# Altium PCB standos_rpi_com_sample.PcbDoc
Units mm, origin at the board's own origin, x right, y up, seen from the top; angles counter-clockwise.
Board outline 98 x 35 mm, 2 copper layers (Top Layer, Bottom Layer); 3 components, 0 nets, 76 pads, 0 vias.
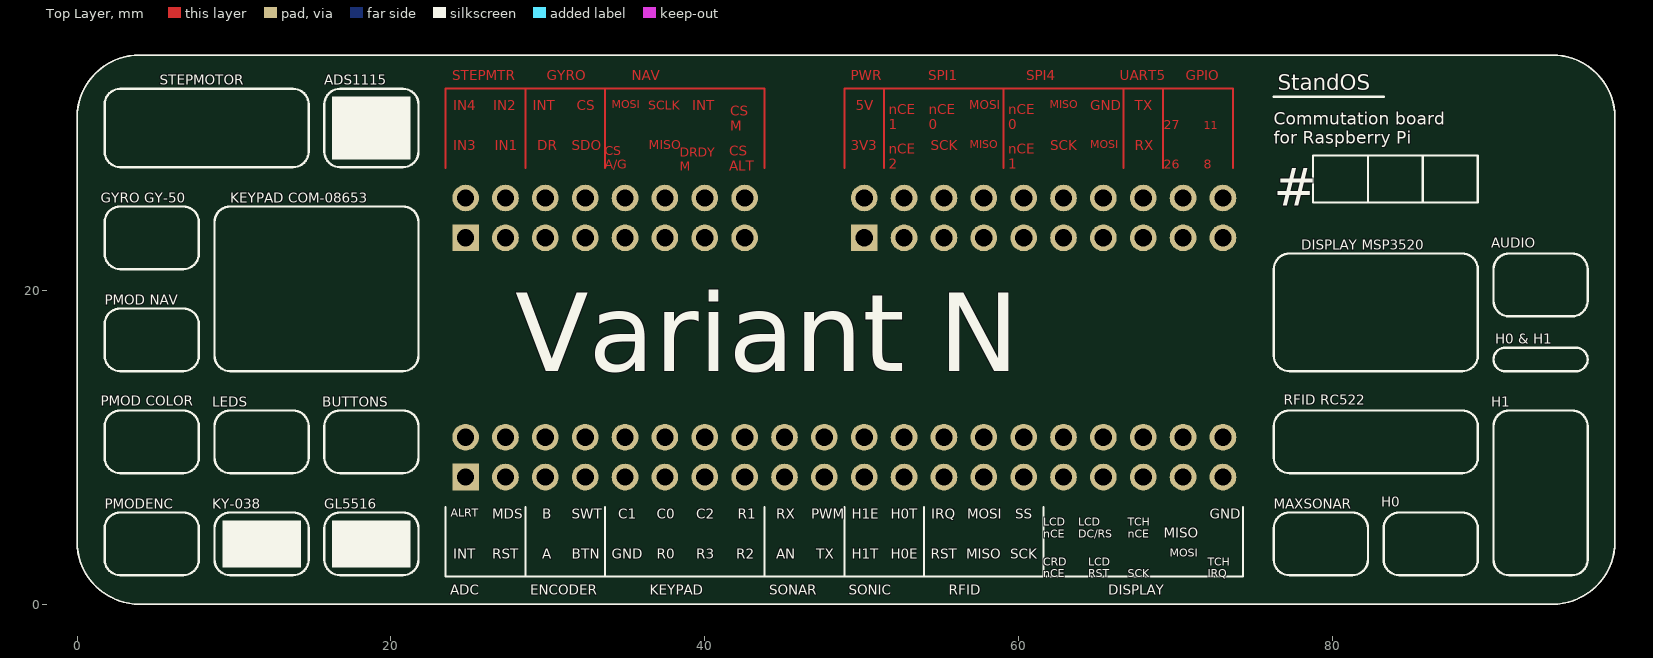
[diagram p0: Top Layer view]
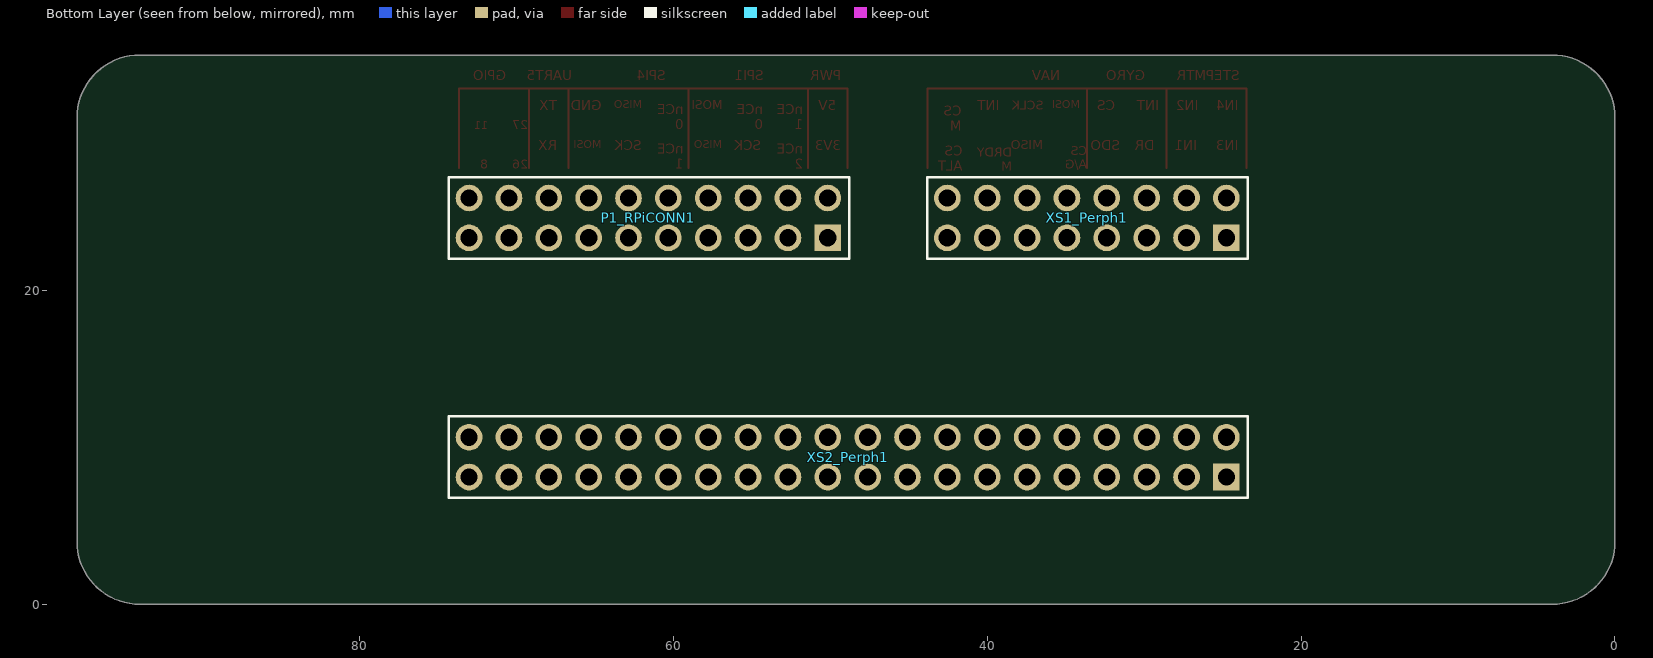
[diagram p1: Bottom Layer view, seen from below]

## Layer stack, top to bottom
Top Solder: solder mask 0.0102, Solder Resist, Dk 3.5
Top Layer: signal copper 0.0356
Dielectric 1: dielectric 0.32, FR-4, Dk 4.8
Bottom Layer: signal copper 0.0356
Bottom Solder: solder mask 0.0102, Solder Resist, Dk 3.5

## Board outline
0,4 0,31 cw(c4,31) 4,35 94,35 cw(c94,31) 98,31 98,4 cw(c94,4) 94,0 4,0 cw(c4,4)

## Design rules (kind name [scope] priority, off if disabled: settings)
Clearance [All] p1: gap=0.254 ignorepadtopadclearanceinfootprint=FALSE except(0: Arc-Hole Track-Hole SMDPad-Hole THPad-Hole Via-Hole Fill-Hole Poly-Hole Region-Hole Text-Hole)
PolygonConnect [All] p1: connectstyle=Relief reliefconductorwidth=0.254 reliefentries=4 polygonreliefangle="90 Angle" airgapwidth=0.254
RoutingVias [All] p1: holewidth=0.711 width=1.27 viastyle="Through Hole" minholewidth=0.711 minwidth=1.27 maxholewidth=0.711 maxwidth=1.27
SolderMaskExpansion [All] p1: expansion=0.102 istentingtop=FALSE
Width [All] p1: maxlimit=0.254 minlimit=0.254 preferedwidth=0.254
30 further rules are at their usual default settings.

## Components (designator, comment, footprint, x,y, rotation, side; value= is the part's Value field where it differs from the comment)
P1_RPiCONN1 "PLD-20" PLD-20_reverse 50.16,23.35 r0 bottom (schematic designator P1)
XS1_Perph1 "PLD-16" PLD-16_reverse 24.76,23.35 r0 bottom (schematic designator XS1)
XS2_Perph1 "PLD-40" PLD-40_reverse 24.76,8.11 r0 bottom (schematic designator XS2)

## Footprints (in the part's own frame and the unit in brackets; to place one, negate y for a bottom-side part, rotate by r counter-clockwise, add the part's x,y. Pads: shape width x height; smd on the part's side, far side on the other; paste and mask are expansions set on the pad)
PLD-16_reverse [mm]
  rect 1.7x1.7 hole 1.1: 1(0,0)
  round 1.7 hole 1.1: 2(0,-2.54) 3(2.54,0) 4(2.54,-2.54) 5(5.08,0) 6(5.08,-2.54) 7(7.62,0) 8(7.62,-2.54) 9(10.16,0) 10(10.16,-2.54) 11(12.7,0) 12(12.7,-2.54) 13(15.24,0) 14(15.24,-2.54) 15(17.78,0) 16(17.78,-2.54)
  silkscreen extent -1.36,-3.87 19.07,1.33, body extent -1.29,-3.8 19.03,1.28, height 8.54
PLD-20_reverse [mm]
  rect 1.7x1.7 hole 1.1: 1(0,0)
  round 1.7 hole 1.1: 2(0,-2.54) 3(2.54,0) 4(2.54,-2.54) 5(5.08,0) 6(5.08,-2.54) 7(7.62,0) 8(7.62,-2.54) 9(10.16,0) 10(10.16,-2.54) 11(12.7,0) 12(12.7,-2.54) 13(15.24,0) 14(15.24,-2.54) 15(17.78,0) 16(17.78,-2.54) 17(20.32,0) 18(20.32,-2.54) 19(22.86,0) 20(22.86,-2.54)
  silkscreen extent -1.36,-3.87 24.15,1.33, body extent -1.29,-3.8 24.11,1.28, height 8.54
PLD-40_reverse [mm]
  rect 1.7x1.7 hole 1.1: 1(0,0)
  round 1.7 hole 1.1: 2(0,-2.54) 3(2.54,0) 4(2.54,-2.54) 5(5.08,0) 6(5.08,-2.54) 7(7.62,0) 8(7.62,-2.54) 9(10.16,0) 10(10.16,-2.54) 11(12.7,0) 12(12.7,-2.54) 13(15.24,0) 14(15.24,-2.54) 15(17.78,0) 16(17.78,-2.54) 17(20.32,0) 18(20.32,-2.54) 19(22.86,0) 20(22.86,-2.54) 21(25.4,0) 22(25.4,-2.54) 23(27.94,0) 24(27.94,-2.54) 25(30.48,0) 26(30.48,-2.54) 27(33.02,0) 28(33.02,-2.54) 29(35.56,0) 30(35.56,-2.54) 31(38.1,0) 32(38.1,-2.54) 33(40.64,0) 34(40.64,-2.54) 35(43.18,0) 36(43.18,-2.54) 37(45.72,0) 38(45.72,-2.54) 39(48.26,0) 40(48.26,-2.54)
  silkscreen extent -1.36,-3.87 49.55,1.33, body extent -1.29,-3.8 49.51,1.28, height 8.54

## Nets (pads, with @x,y where several pads share a name; then routed paths per layer and width w, separated by ;. In a path a pad name is that pad's centre, name@x,y a point inside that pad or via, vN(x,y) a via of type N, cw(c..) or ccw(c..) an arc to the next point about the centre after c; other vN are vias at no path point)
pads on no net: P1_RPiCONN1.1 P1_RPiCONN1.2 P1_RPiCONN1.3 P1_RPiCONN1.4 P1_RPiCONN1.5 P1_RPiCONN1.6 P1_RPiCONN1.7 P1_RPiCONN1.8 P1_RPiCONN1.9 P1_RPiCONN1.10 P1_RPiCONN1.11 P1_RPiCONN1.12 P1_RPiCONN1.13 P1_RPiCONN1.14 P1_RPiCONN1.15 P1_RPiCONN1.16 P1_RPiCONN1.17 P1_RPiCONN1.18 P1_RPiCONN1.19 P1_RPiCONN1.20 XS1_Perph1.1 XS1_Perph1.2 XS1_Perph1.3 XS1_Perph1.4 XS1_Perph1.5 XS1_Perph1.6 XS1_Perph1.7 XS1_Perph1.8 XS1_Perph1.9 XS1_Perph1.10 XS1_Perph1.11 XS1_Perph1.12 XS1_Perph1.13 XS1_Perph1.14 XS1_Perph1.15 XS1_Perph1.16 XS2_Perph1.1 XS2_Perph1.2 XS2_Perph1.3 XS2_Perph1.4 XS2_Perph1.5 XS2_Perph1.6 XS2_Perph1.7 XS2_Perph1.8 XS2_Perph1.9 XS2_Perph1.10 XS2_Perph1.11 XS2_Perph1.12 XS2_Perph1.13 XS2_Perph1.14 XS2_Perph1.15 XS2_Perph1.16 XS2_Perph1.17 XS2_Perph1.18 XS2_Perph1.19 XS2_Perph1.20 XS2_Perph1.21 XS2_Perph1.22 XS2_Perph1.23 XS2_Perph1.24 XS2_Perph1.25 XS2_Perph1.26 XS2_Perph1.27 XS2_Perph1.28 XS2_Perph1.29 XS2_Perph1.30 XS2_Perph1.31 XS2_Perph1.32 XS2_Perph1.33 XS2_Perph1.34 XS2_Perph1.35 XS2_Perph1.36 XS2_Perph1.37 XS2_Perph1.38 XS2_Perph1.39 XS2_Perph1.40
copper on no net: | length 95.9
  Top Layer w0.127: 23.49,27.795 23.49,32.875 43.81,32.875 43.81,27.795 ; 28.57,27.795 28.57,32.875 ; 33.65,27.795 33.65,32.875 ; 48.89,27.795 48.89,32.875 51.43,32.875 ; 51.43,27.795 51.43,32.875 ; 59.05,27.795 59.05,32.875 ; 66.67,27.795 66.67,32.875 ; 69.21,27.795 69.21,32.875 ; 73.655,27.795 73.655,32.875 69.21,32.875 ; 51.43,32.875 59.05,32.875 ; 59.05,32.875 66.67,32.875 ; 66.67,32.875 69.21,32.875

## Other copper
Top Layer:
  text "STEPMTR" at 23.914,33.383 h0.64
  text "GYRO" at 29.946,33.383 h0.64
  text "NAV" at 35.344,33.383 h0.64
  text "PWR" at 49.314,33.383 h0.64
  text "SPI1" at 54.235,33.383 h0.64
  text "SPI4" at 60.479,33.383 h0.64
  text "UART5" at 66.459,33.383 h0.64
  text "GPIO" at 70.639,33.383 h0.64
  text "MOSI" at 34.074,31.605 h0.51
  text "MISO" at 61.971,31.605 h0.51
  text "MOSI" at 56.849,31.554 h0.56
  text "SCLK" at 36.389,31.529 h0.58
  text "IN4" at 23.967,31.478 h0.64
  text "IN2" at 26.507,31.478 h0.64
  text "INT" at 29.047,31.478 h0.64
  text "CS" at 31.851,31.478 h0.64
  text "INT" at 39.207,31.478 h0.64
  text "5V" at 49.631,31.478 h0.64
  text "GND" at 64.554,31.478 h0.64
  text "TX" at 67.411,31.478 h0.64
  text "nCE / 1" at 51.727,30.285 h0.64
  text "nCE / 0" at 54.267,30.285 h0.64
  text "nCE / 0" at 59.347,30.285 h0.64
  text "27" at 69.242,30.285 h0.58
  text "11" at 71.782,30.285 h0.51
  text "CS / M" at 41.62,30.168 h0.64
  text "MISO" at 56.891,29.065 h0.51
  text "MOSI" at 64.554,29.065 h0.51
  text "MISO" at 36.438,28.989 h0.58
  text "IN3" at 23.967,28.938 h0.64
  text "IN1" at 26.612,28.938 h0.64
  text "DR" at 29.311,28.938 h0.64
  text "SDO" at 31.534,28.938 h0.64
  text "3V3" at 49.314,28.938 h0.64
  text "SCK" at 54.394,28.938 h0.64
  text "SCK" at 62.014,28.938 h0.64
  text "RX" at 67.411,28.938 h0.64
  text "CS / A/G" at 33.64,27.745 h0.58
  text "nCE / 2" at 51.727,27.745 h0.64
  text "nCE / 1" at 59.347,27.745 h0.64
  text "26" at 69.242,27.745 h0.58
  text "8" at 71.782,27.745 h0.58
  text "DRDY / M" at 38.392,27.628 h0.58
  text "CS / ALT" at 41.567,27.628 h0.64

## Silkscreen, mask and mechanical layers (free items; w line width, h text height)
Top Overlay:
  drawing of 169 lines, arcs and shapes, not listed
  text "STEPMOTOR" at 5.26,33.1 h0.64
  text "ADS1115" at 15.76,33.1 h0.64
  text "StandOS" at 76.5,32.75 h1
  text "Commutation board / for Raspberry Pi" at 76.26,29.35 h0.8
  text "GYRO GY-50" at 1.51,25.6 h0.64
  text "KEYPAD COM-08653" at 9.76,25.6 h0.64
  text "#" at 76.26,25.4 h2.4
  text "AUDIO" at 90.118,22.711 h0.64
  text "DISPLAY MSP3520" at 78.01,22.6 h0.64
  text "PMOD NAV" at 1.76,19.1 h0.64
  text "H0 & H1" at 90.368,16.6 h0.64
  text "Variant N" at 27.933,14.852 h5
  text "RFID RC522" at 76.885,12.711 h0.64
  text "PMOD COLOR" at 1.51,12.645 h0.64
  text "LEDS" at 8.618,12.6 h0.64
  text "BUTTONS" at 15.618,12.6 h0.64
  text "H1" at 90.118,12.6 h0.64
  text "H0" at 83.118,6.211 h0.64
  text "PMODENC" at 1.76,6.1 h0.64
  text "KY-038" at 8.618,6.1 h0.64
  text "GL5516" at 15.76,6.1 h0.64
  text "MAXSONAR" at 76.26,6.1 h0.64
  text "ALRT" at 23.829,5.57 h0.51
  text "MDS" at 26.454,5.443 h0.64
  text "B" at 29.628,5.443 h0.64
  text "SWT" at 31.534,5.443 h0.64
  text "C1" at 34.497,5.443 h0.64
  text "C0" at 36.931,5.443 h0.64
  text "C2" at 39.471,5.443 h0.64
  text "R1" at 42.117,5.443 h0.64
  text "RX" at 44.551,5.443 h0.64
  text "PWM" at 46.774,5.443 h0.64
  text "H1E" at 49.367,5.443 h0.64
  text "H0T" at 51.854,5.443 h0.64
  text "IRQ" at 54.447,5.443 h0.64
  text "MOSI" at 56.722,5.443 h0.64
  text "SS" at 59.791,5.443 h0.64
  text "GND" at 72.174,5.443 h0.64
  text "LCD / nCE" at 61.569,4.25 h0.51
  text "LCD / DC/RS" at 63.792,4.25 h0.51
  text "TCH / nCE" at 66.967,4.25 h0.51
  text "MISO" at 69.242,4.25 h0.64
  text "MOSI" at 69.634,3.03 h0.51
  text "INT" at 23.967,2.903 h0.64
  text "RST" at 26.454,2.903 h0.64
  text "A" at 29.628,2.903 h0.64
  text "BTN" at 31.534,2.903 h0.64
  text "GND" at 34.074,2.903 h0.64
  text "R0" at 36.931,2.903 h0.64
  text "R3" at 39.471,2.903 h0.64
  text "R2" at 42.011,2.903 h0.64
  text "AN" at 44.551,2.903 h0.64
  text "TX" at 47.091,2.903 h0.64
  text "H1T" at 49.367,2.903 h0.64
  text "H0E" at 51.854,2.903 h0.64
  text "RST" at 54.394,2.903 h0.64
  text "MISO" at 56.669,2.903 h0.64
  text "SCK" at 59.474,2.903 h0.64
  text "CRD / nCE" at 61.569,1.71 h0.51
  text "LCD / RST" at 64.427,1.71 h0.51
  text "SCK" at 66.967,1.71 h0.51
  text "TCH / IRQ" at 72.047,1.71 h0.51
  text "ADC" at 23.787,0.617 h0.64
  text "ENCODER" at 28.867,0.617 h0.64
  text "KEYPAD" at 36.487,0.617 h0.64
  text "SONAR" at 44.107,0.617 h0.64
  text "SONIC" at 49.187,0.617 h0.64
  text "RFID" at 55.537,0.617 h0.64
  text "DISPLAY" at 65.697,0.617 h0.64
Mechanical 2:
  the board outline again, w0.1